# Altium PCB IMU_Breakout.PcbDoc
Units mm, origin at the board's own origin, x right, y up, seen from the top; angles counter-clockwise.
Board outline 20.07 x 13.84 mm, 2 copper layers (Top Layer, Bottom Layer); 10 components, 10 nets, 34 pads, 7 vias.
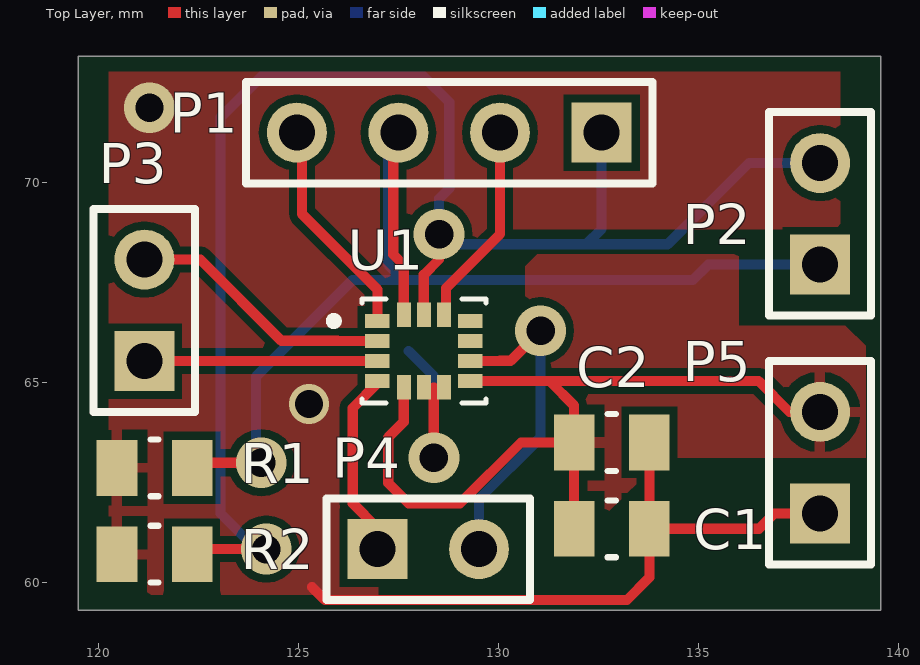
[diagram p0: Top Layer view]
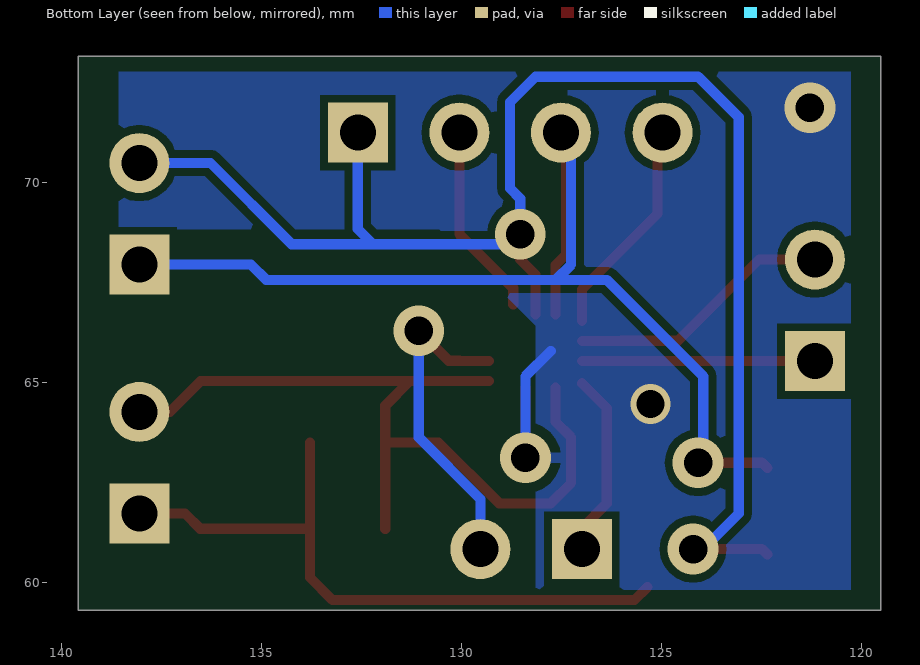
[diagram p1: Bottom Layer view, seen from below]

## Layer stack, top to bottom
Top Solder: solder mask 0.0102, Solder Resist, Dk 3.5
Top Layer: signal copper 0.0356
Dielectric 1: dielectric 0.32, FR-4, Dk 4.8
Bottom Layer: signal copper 0.0356
Bottom Solder: solder mask 0.0102, Solder Resist, Dk 3.5

## Board outline
119.507,59.309 119.507,73.152 139.573,73.152 139.573,59.309

## Design rules (kind name [scope] priority, off if disabled: settings)
Clearance [All] p1: gap=0.15 ignorepadtopadclearanceinfootprint=FALSE except(0: Arc-Hole Track-Hole SMDPad-Hole THPad-Hole Via-Hole Fill-Hole Poly-Hole Region-Hole Text-Hole)
PolygonConnect [All] p1: connectstyle=Relief reliefconductorwidth=0.254 reliefentries=4 polygonreliefangle="90 Angle" airgapwidth=0.254
RoomDefinition IMU_breakout [InComponentClass('IMU_breakout')] p1: confinementstyle=ConfineIn formatcopy=TRUE lockcomponents=FALSE outline 119.507,73.152 119.507,59.309 139.573,59.309 139.573,73.152
RoutingVias [All] p1: holewidth=0.711 width=1.27 viastyle="Through Hole" minholewidth=0.711 minwidth=1.27 maxholewidth=0.711 maxwidth=1.27
SolderMaskExpansion [All] p1: expansion=0.102
Width [All] p1: maxlimit=0.254 minlimit=0.254 preferedwidth=0.254
30 further rules are at their usual default settings.

## Components (designator, comment, footprint, x,y, rotation, side; value= is the part's Value field where it differs from the comment)
C1 "100nF" 0805 132.842,61.341 r180 top
C2 "100nF" 0805 132.842,63.5 r180 top
P1 "SPI" HDR1X4 132.588,71.247 r180 top
P2 "I2C" HDR1X2 138.049,67.945 r90 top
P3 "SDX/SCX" HDR1X2 121.158,65.532 r90 top
P4 "INT" HDR1X2 126.983,60.833 r0 top
P5 "PWR" HDR1X2 138.049,61.722 r90 top
R1 "10k" 0805 121.412,62.865 r180 top
R2 "10k" 0805 121.412,60.706 r180 top
U1 "LSM6DSLTR" LGA-14 128.143,65.786 r0 top

## Footprints (in the part's own frame and the unit in brackets; to place one, negate y for a bottom-side part, rotate by r counter-clockwise, add the part's x,y. Pads: shape width x height; smd on the part's side, far side on the other; paste and mask are expansions set on the pad)
0805 [mil]
  rect 40x55 smd: 1(-37,0) 2(37,0)
  silkscreen extent -4,-28 4,28
HDR1X2 [mm] "Connector; Header; 2 Position"
  rect 1.5x1.5 hole 0.9: 1(0,0)
  round 1.5 hole 0.9: 2(2.54,0)
  silkscreen extent -1.27,-1.27 3.81,1.27
HDR1X4 [mm] "Connector; Header; 4 Position"
  rect 1.5x1.5 hole 0.9: 1(0,0)
  round 1.5 hole 0.9: 2(2.54,0) 3(5.08,0) 4(7.62,0)
  silkscreen extent -1.27,-1.27 8.89,1.27
LGA-14 [mm]
  rect 0.61x0.35 smd: 1(-1.16,0.75) 2(-1.16,0.25) 3(-1.16,-0.25) 4(-1.16,-0.75) 8(1.16,-0.75) 9(1.16,-0.25) 10(1.16,0.25) 11(1.16,0.75)
  rect 0.35x0.61 smd: 5(-0.5,-0.91) 6(0,-0.91) 7(0.5,-0.91) 12(0.5,0.91) 13(0,0.91) 14(-0.5,0.91)
  silkscreen extent -2.35,-1.3 1.55,1.3

## Part data
C1 C2: library part "CAP 100nF 0805", "CAP CER 0.1UF 50V X7R 0805", Package=0805, Rating=50V, Tolerance=10%, Digikey=311-1140-1-ND, Digikey Link=https://www.digikey.ca/products/en?keywords=311-1140-1-ND, MF=Yageo, MP=CC0805KRX7R9BB104, Price="0,119 CAD"
P1: library part "Header 4", "Header, 4-Pin", LatestRevisionDate=17-Jul-2002, LatestRevisionNote="Re-released for DXP Platform.", Publisher="Altium Limited"
P2 P3 P4 P5: library part "Header 2", "Header, 2-Pin", LatestRevisionDate=17-Jul-2002, LatestRevisionNote="Re-released for DXP Platform.", Publisher="Altium Limited"
R1 R2: library part "RES 10k 0805", "RES SMD 10K OHM 1% 1/8W 0805", Package=0805, Rating=0.125W, Tolerance=1%, Digikey=311-10.0KCRCT-ND, Digikey Link=https://www.digikey.ca/products/en?keywords=311-10.0KCRCT-ND, MF=Yageo, MP=RC0805FR-0710KL, Price="0.061 CAD"
U1: "Accelerometer, Gyroscope, Temperature, 6 Axis Sensor I²C, SPI Output", Package="LGA-14 STMicroelectronics", Availability=Unavailable, MF=STMicroelectronics, MP=LSM6DSLTR, Price=None, SnapEDA_Link=https://www.snapeda.com/parts/LSM6DSLTR/STMicroelectronics/view-part/550517/?ref=snap

## Via types
v1: diameter 1.27, hole 0.711, Top Layer to Bottom Layer, 6 vias
v2: diameter 1, hole 0.7, Top Layer to Bottom Layer, 1 vias

## Nets (pads, with @x,y where several pads share a name; then routed paths per layer and width w, separated by ;. In a path a pad name is that pad's centre, name@x,y a point inside that pad or via, vN(x,y) a via of type N, cw(c..) or ccw(c..) an arc to the next point about the centre after c; other vN are vias at no path point)
3V3: C1.2 C2.2 P5.2 U1.5 U1.8 | length 21.1
  Top Layer w0.254: U1.5 127.643,64.016 127.254,63.627 127.254,62.484 127.762,61.976 129.049,61.976 130.573,63.5 C2.2 ; U1.8 131.285,65.036 ; C1.2 C2.2 ; P5.2 137.287,64.262 136.513,65.036 131.285,65.036 ; 131.285,65.036 131.902,64.419 C2.2
CS: P1.2 U1.12 | length 4.9
  Top Layer w0.254: U1.12@128.699,66.951 128.699,67.358 130.048,68.707 P1.2
GND: C1.1 C2.1 P5.1 R1.2 R2.2 U1.6 U1.7 | length 20.9
  Top Layer w0.254: 125.349,59.883 125.669,59.563 133.223,59.563 133.782,60.122 C1.1 ; v1@128.393,63.504 128.393,64.876 ; C2.1 C1.1 ; P5.1 136.906,61.722 136.525,61.341 C1.1
  Bottom Layer w0.254: 127.763,65.786 128.397,65.152 v1(128.397,63.119)
  other v1: 121.285,71.865
  other v2: 125.269,64.455
INT1: P4.1 U1.4 | length 4.7
  Top Layer w0.254: P4.1 126.983,61.358 126.365,61.976 126.365,64.362 U1.4@126.983,64.98
INT2: P4.2 U1.9 | length 7.9
  Top Layer w0.254: U1.9 130.052,65.536 ; 130.052,65.544 130.314,65.544 v1(131.064,66.294)
  Bottom Layer w0.254: P4.2 129.523,62.086 131.064,63.627 v1@131.064,66.04
SCL_SCLK: P1.1 P2.2 R2.1 U1.13 | length 38.2
  Top Layer w0.254: R2.1 122.479,60.833 v1(124.206,60.833) ; U1.13 128.143,67.691 ; 128.151,67.691 128.151,67.699 128.524,68.072 v1(128.524,68.707)
  Bottom Layer w0.254: v1@123.825,60.96 123.063,61.722 123.063,71.628 124.079,72.644 128.143,72.644 128.778,72.009 128.778,69.85 128.524,69.596 v1(128.524,68.707) ; v1@128.524,68.453 132.207,68.453 ; P1.1 132.588,68.834 132.207,68.453 ; P2.2 136.271,70.485 134.239,68.453 132.207,68.453
SCX: P3.1 U1.3 | length 5.8
  Top Layer w0.254: P3.1 121.162,65.536 U1.3
SD0_MOSI: P1.4 U1.1 | length 5.5
  Top Layer w0.254: P1.4 125.095,71.12 125.095,69.215 126.983,67.327 U1.1
SDA_MISO: P1.3 P2.1 R1.1 U1.14 | length 27.7
  Top Layer w0.254: R1.1 122.479,62.992 v1(124.079,62.992) ; P1.3 127.381,71.12 127.381,68.199 127.643,67.937 U1.14
  Bottom Layer w0.254: v1@123.952,63.119 123.952,65.151 126.365,67.564 127.635,67.564 ; P1.3 127.254,70.993 127.254,67.945 127.635,67.564 ; P2.1 135.255,67.945 134.874,67.564 127.635,67.564
SDX: P3.2 U1.2 | length 6.7
  Top Layer w0.254: P3.2 122.555,68.072 124.583,66.044 125.988,66.044 ; 125.988,66.036 U1.2
pads on no net: U1.10 U1.11

## Polygon pours and split planes (outlines as drawn)
3V3 on Top Layer (solid, pour order 4): 130.683,59.69 130.683,67.908 130.974,68.199 135.908,68.199 136.017,68.308 136.017,66.421 138.684,66.421 139.192,65.913 139.192,63.119 134.112,63.119
GND on Top Layer (solid, pour order 0): 120.269,59.69 120.269,72.771 138.557,72.771 138.557,68.961 138.43,68.834 130.175,68.834 127,65.659 127,59.69
GND on Bottom Layer (solid, pour order 2): 128.143,59.817 128.143,66.421 130.556,68.834 138.557,68.834 138.557,72.771 120.269,72.771 120.269,59.817